# Altium PCB AgulhasCPU25.PCBDOC (part 7 of 10)
Units mm, origin at the board's own origin, x right, y up, seen from the top; angles counter-clockwise.
Board outline 179.96 x 114.94 mm, 2 copper layers (Top Layer, Top, Bottom Layer, Bottom), stack 1.341 mm thick; 247 components, 222 nets, 910 pads, 491 vias.
Unrouted connection lines stored in the file: 2.
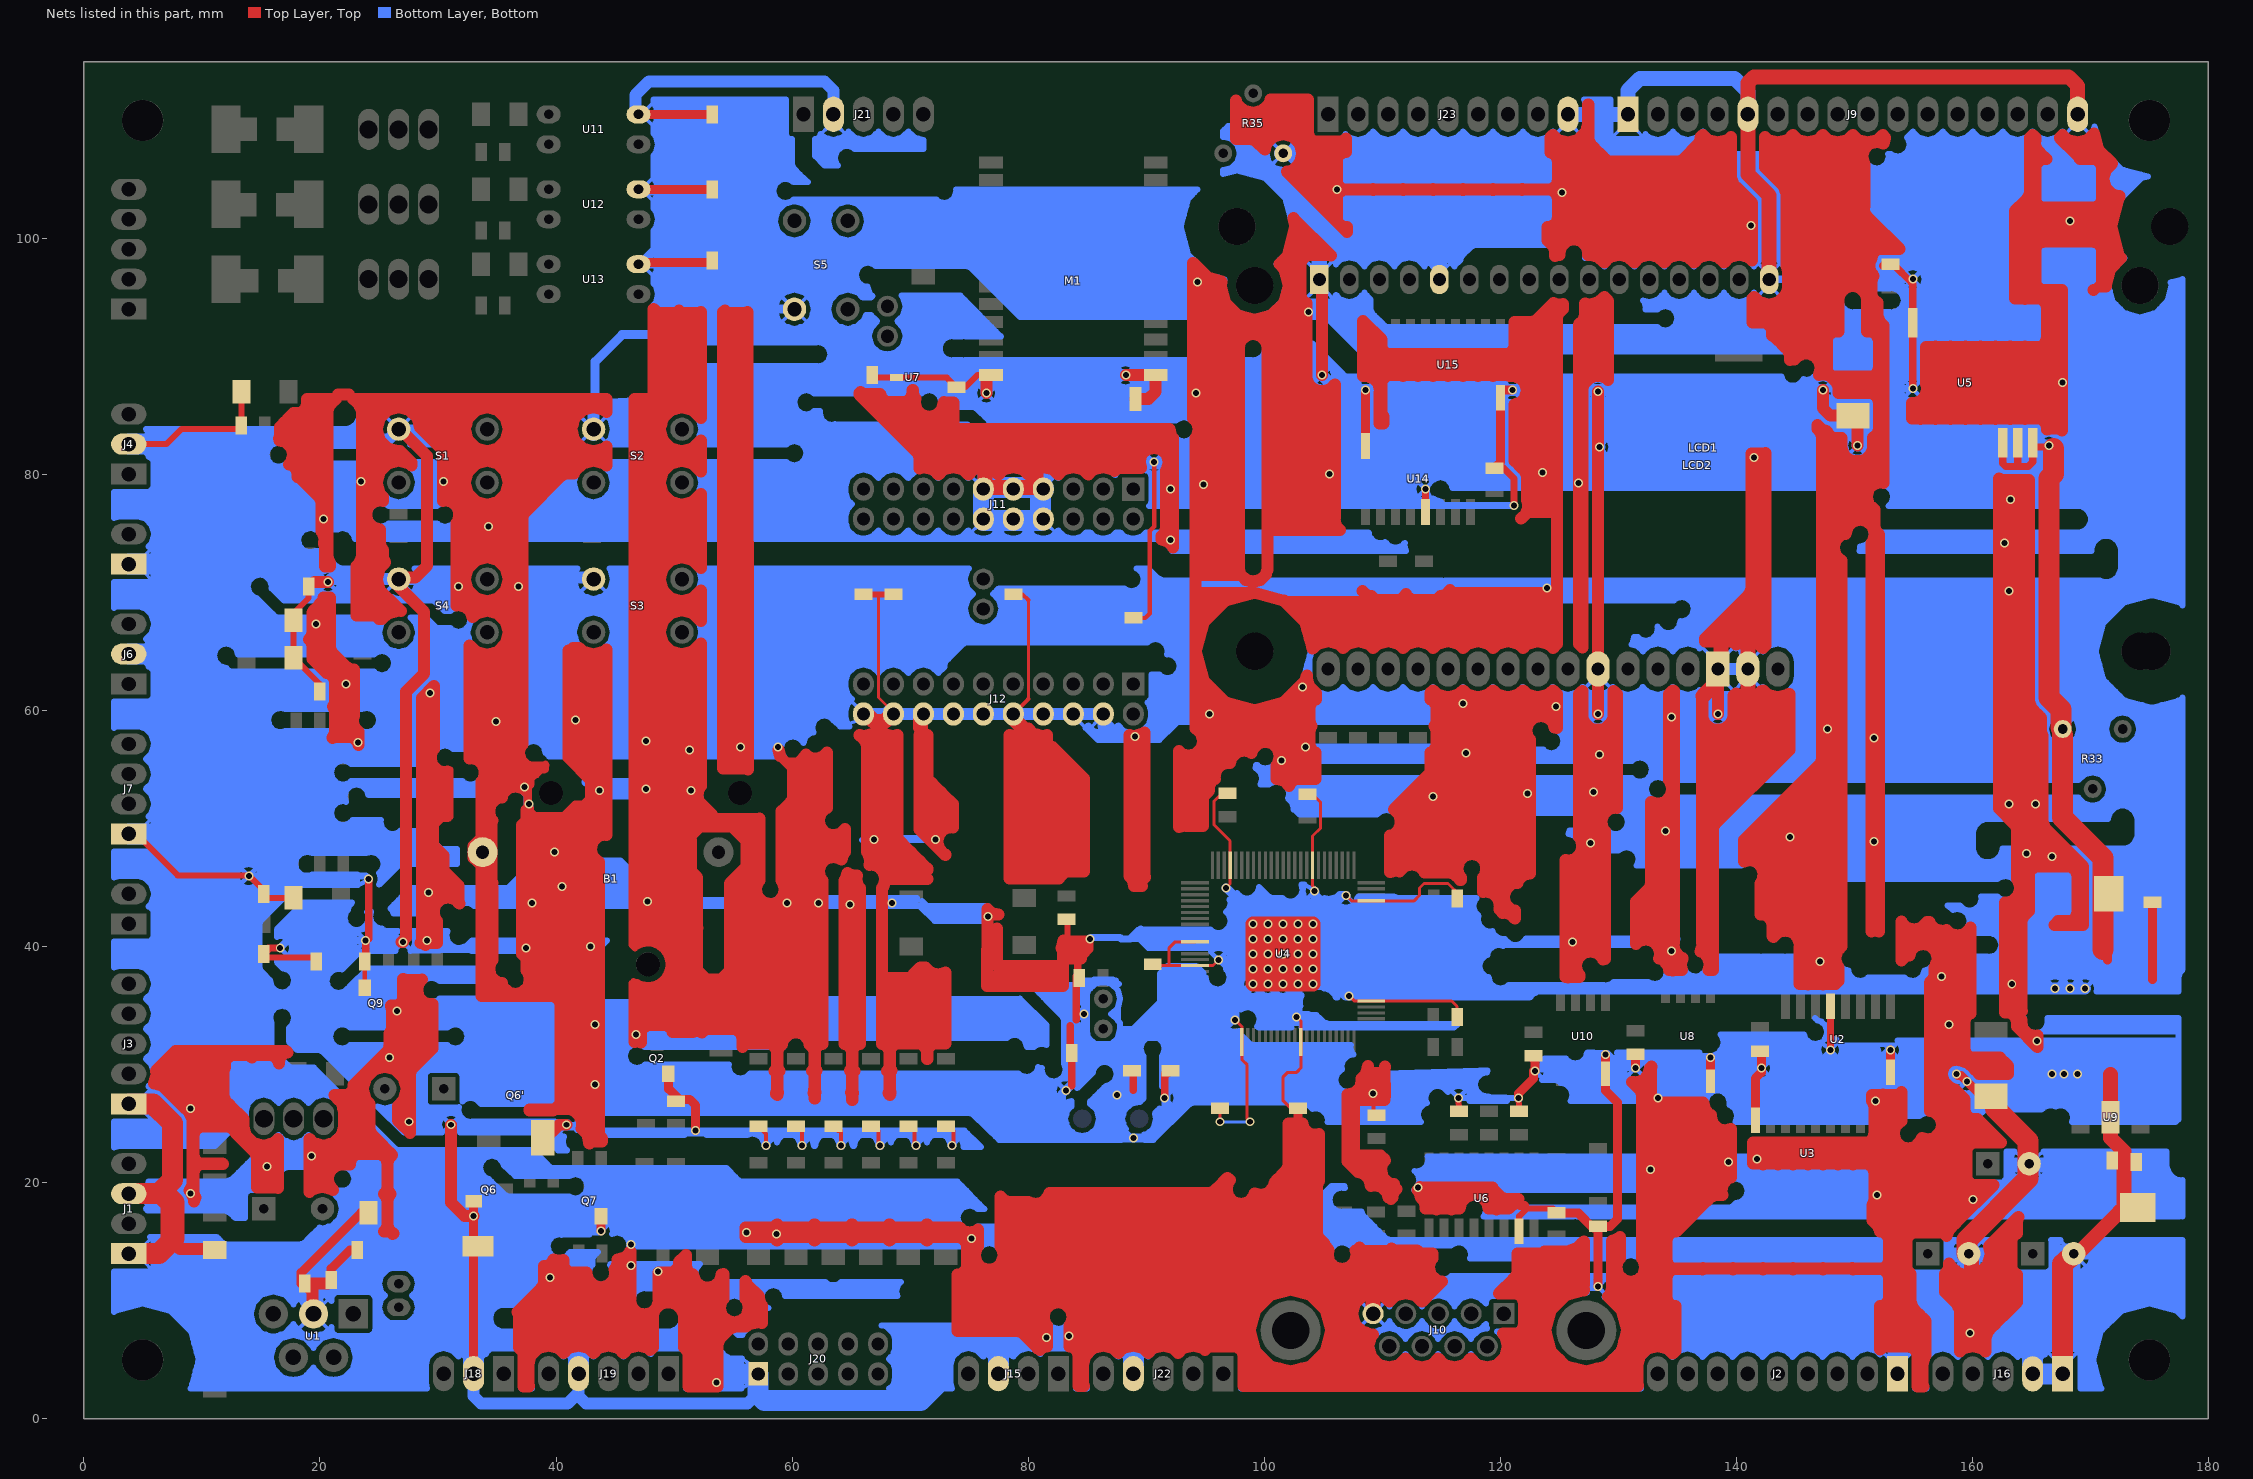
[diagram p7: the nets of this part, all layers, seen from the top]

## Via types
v1: diameter 0.762, hole 0.508, Top Layer, Top to Bottom Layer, Bottom, 489 vias
v2: diameter 0.864, hole 0.813, Top Layer, Top to Bottom Layer, Bottom, 2 vias

## Nets (pads, with @x,y where several pads share a name; then routed paths per layer and width w, separated by ;. In a path a pad name is that pad's centre, name@x,y a point inside that pad or via, vN(x,y) a via of type N, cw(c..) or ccw(c..) an arc to the next point about the centre after c; other vN are vias at no path point) (continued)
GND: (continued)
  Bottom Layer, Bottom w0.508: 118.567,108.458 120.167,108.458 ; 118.618,7.874 118.796,7.874 ; 118.72,17.501 177.8,17.501 ; 118.745,9.779 118.796,9.779 ; 118.897,27.305 118.974,27.305 ; 118.974,61.595 119.761,61.595 ; 119.177,108.839 119.558,108.839 ; 119.355,61.976 119.38,61.976 ; 119.71,4.826 125.451,4.826 ; 120.015,7.112 124.104,7.112 ; 120.04,36.449 165.964,36.449 ; 120.091,5.207 125.07,5.207 ; 120.218,40.64 105.156,40.64 ; 120.269,6.731 124.206,6.731 ; 120.294,5.588 124.689,5.588 ; 120.294,40.64 120.371,40.64 ; 120.371,6.35 124.308,6.35 ; 120.396,5.969 124.409,5.969 ; 121.107,108.458 122.707,108.458 ; 121.514,7.493 124.003,7.493 ; 121.514,61.595 122.301,61.595 ; 121.641,10.16 125.501,10.16 ; 121.666,86.36 127.483,86.36 ; 121.666,87.884 127.737,87.884 ; 121.717,108.839 122.098,108.839 ; 121.768,7.874 124.104,7.874 ; 121.793,8.255 124.206,8.255 ; 121.793,8.636 124.308,8.636 ; 121.793,9.017 124.409,9.017 ; 121.793,9.398 124.739,9.398 ; 121.793,9.779 125.12,9.779 ; 121.895,61.976 121.92,61.976 ; 121.945,86.741 127.305,86.741 ; 121.945,87.503 127.356,87.503 ; 122.174,40.64 134.976,40.64 ; 123.469,59.309 127.33,59.309 ; 123.647,108.458 125.247,108.458 ; 123.673,30.124 126.213,30.124 ; 123.825,28.981 130.759,28.981 ; 123.876,29.743 130.404,29.743 ; 123.927,29.362 130.505,29.362 ; 124.054,61.595 124.841,61.595 ; 124.206,58.928 127.61,58.928 ; 124.257,108.839 124.638,108.839 ; 124.384,58.547 166.243,58.547 ; 124.435,61.976 124.46,61.976 ; 124.917,28.6 157.81,28.6 ; 124.968,56.642 177.8,56.642 ; 124.968,58.166 166.268,58.166 ; 125.247,57.023 167.538,57.023 ; 125.247,57.785 166.37,57.785 ; 125.705,28.219 158.471,28.219 ; 126.009,27.076 137.465,27.076 ; 126.009,27.838 158.826,27.838 ; 126.111,27.457 137.668,27.457 ; 126.187,108.458 129.591,108.458 ; 126.238,49.403 160.045,49.403 ; 126.263,99.695 172.288,99.695 ; 126.39,15.113 154.61,15.113 ; 126.492,30.124 128.219,30.124 ; 126.594,61.595 127.381,61.595 ; 126.619,49.022 160.045,49.022 ; 126.67,48.26 130.15,48.26 ; 126.721,48.641 160.045,48.641 ; 126.797,108.839 129.311,108.839 ; 126.975,61.976 127,61.976 ; 127,99.314 172.39,99.314 ; 127.102,109.22 129.311,109.22 ; 127.152,30.505 127.965,30.505 ; 127.152,111.506 129.311,111.506 ; 127.178,98.933 172.491,98.933 ; 127.203,109.601 129.311,109.601 ; 127.229,98.552 172.644,98.552 ; 127.229,109.982 129.311,109.982 ; 127.229,110.363 129.311,110.363 ; 127.229,110.744 129.311,110.744 ; 127.229,111.125 129.311,111.125 ; 127.254,87.122 122.047,87.122 ; 127.305,30.886 127.864,30.886 ; 127.61,82.931 93.726,82.931 ; 128.143,4.445 131.826,4.445 ; 128.219,85.979 76.962,85.979 ; 128.27,98.171 129.311,98.171 ; 128.295,85.979 177.8,85.979 ; 128.422,83.312 149.708,83.312 ; 128.651,97.79 128.93,97.79 ; 128.778,12.065 130.404,12.065 ; 128.778,87.884 143.993,87.884 ; 128.905,58.928 137.77,58.928 ; 128.905,60.452 137.77,60.452 ; 129.032,10.16 177.8,10.16 ; 129.032,10.541 177.8,10.541 ; 129.032,86.36 146.66,86.36 ; 129.083,4.826 131.877,4.826 ; 129.134,49.784 125.857,49.784 ; 129.134,61.595 129.921,61.595 ; 129.159,11.684 177.8,11.684 ; 129.159,82.931 149.327,82.931 ; 129.159,87.503 144.729,87.503 ; 129.184,59.309 137.49,59.309 ; 129.184,60.071 137.49,60.071 ; 129.21,10.922 177.8,10.922 ; 129.21,86.741 146.38,86.741 ; 129.261,11.303 177.8,11.303 ; 129.261,87.122 146.279,87.122 ; 129.286,81.788 149.454,81.788 ; 129.337,82.55 149.225,82.55 ; 129.388,82.169 149.276,82.169 ; 129.413,9.779 177.8,9.779 ; 129.464,5.207 132.004,5.207 ; 129.515,61.976 129.54,61.976 ; 129.565,30.124 130.505,30.124 ; 129.794,9.398 173.711,9.398 ; 129.819,30.505 130.81,30.505 ; 129.845,5.588 132.385,5.588 ; 129.921,30.886 136.83,30.886 ; 130.124,5.969 170.485,5.969 ; 130.124,9.017 172.517,9.017 ; 130.226,6.35 170.586,6.35 ; 130.226,8.636 172.136,8.636 ; 130.327,6.731 170.688,6.731 ; 130.327,8.255 171.755,8.255 ; 130.429,7.112 170.79,7.112 ; 130.429,7.874 171.374,7.874 ; 130.429,49.784 160.045,49.784 ; 130.429,51.308 171.628,51.308 ; 130.531,7.493 170.993,7.493 ; 130.708,50.165 160.198,50.165 ; 130.708,50.927 171.475,50.927 ; 130.81,98.171 131.851,98.171 ; 131.191,97.79 131.47,97.79 ; 131.216,65.786 170.637,65.786 ; 131.242,48.26 160.045,48.26 ; 131.597,47.879 160.147,47.879 ; 131.648,47.117 141.046,47.117 ; 131.674,61.595 132.461,61.595 ; 131.674,65.405 132.461,65.405 ; 131.674,66.167 131.318,66.167 ; 131.699,12.065 177.8,12.065 ; 131.699,13.589 154.61,13.589 ; 131.699,47.498 160.401,47.498 ; 131.801,40.259 121.793,40.259 ; 131.851,53.975 132.563,53.975 ; 131.978,12.446 154.889,12.446 ; 131.978,13.208 154.61,13.208 ; 132.004,108.458 132.867,108.458 ; 132.055,30.505 136.779,30.505 ; 132.055,61.976 132.08,61.976 ; 132.055,65.024 132.08,65.024 ; 132.105,28.981 141.427,28.981 ; 132.258,94.361 148.92,94.361 ; 132.309,93.98 133.325,93.98 ; 132.334,55.88 177.8,55.88 ; 132.359,29.362 141.173,29.362 ; 132.359,30.124 136.881,30.124 ; 132.461,29.743 137.236,29.743 ; 132.588,54.356 133.299,54.356 ; 132.715,55.499 177.8,55.499 ; 132.766,54.737 170.078,54.737 ; 132.817,55.118 177.8,55.118 ; 132.842,40.259 134.874,40.259 ; 132.969,66.167 170.739,66.167 ; 133.045,36.83 129.413,36.83 ; 133.121,36.83 166.065,36.83 ; 133.172,94.742 134.569,94.742 ; 133.223,39.878 134.899,39.878 ; 133.248,66.548 134.188,66.548 ; 133.325,39.497 135.103,39.497 ; 133.35,98.171 134.391,98.171 ; 133.375,54.356 169.24,54.356 ; 133.452,66.929 133.35,66.929 ; 133.655,95.123 134.087,95.123 ; 133.731,97.79 134.01,97.79 ; 133.807,108.458 135.407,108.458 ; 133.858,37.211 149.962,37.211 ; 134.036,37.592 135.992,37.592 ; 134.214,61.595 135.001,61.595 ; 134.214,65.405 135.001,65.405 ; 134.239,5.588 134.925,5.588 ; 134.264,66.548 170.84,66.548 ; 134.417,108.839 134.798,108.839 ; 134.595,61.976 134.62,61.976 ; 134.595,65.024 134.62,65.024 ; 134.62,92.456 177.8,92.456 ; 134.62,93.98 149.2,93.98 ; 134.899,92.837 177.8,92.837 ; 134.899,93.599 173.076,93.599 ; 135.001,66.929 170.942,66.929 ; 135.179,67.31 171.044,67.31 ; 135.407,69.596 174.6,69.596 ; 135.712,94.742 137.109,94.742 ; 135.89,98.171 136.931,98.171 ; 136.144,69.215 173.177,69.215 ; 136.195,95.123 136.627,95.123 ; 136.271,68.072 171.78,68.072 ; 136.271,97.79 136.55,97.79 ; 136.322,68.834 172.542,68.834 ; 136.347,108.458 137.668,108.458 ; 136.373,68.453 172.161,68.453 ; 136.754,61.595 136.982,61.595 ; 136.754,65.405 136.982,65.405 ; 136.779,5.588 137.465,5.588 ; 136.957,108.839 137.338,108.839 ; 137.287,39.116 142.062,39.116 ; 137.414,37.973 149.479,37.973 ; 137.465,38.735 148.641,38.735 ; 137.516,38.354 148.819,38.354 ; 138.252,94.742 139.649,94.742 ; 138.328,29.743 141.072,29.743 ; 138.43,98.171 139.471,98.171 ; 138.684,30.124 141.173,30.124 ; 138.709,31.267 146.914,31.267 ; 138.735,30.886 147.015,30.886 ; 138.735,95.123 139.167,95.123 ; 138.786,30.505 141.478,30.505 ; 138.786,32.41 145.745,32.41 ; 138.811,97.79 139.09,97.79 ; 138.862,31.648 147.015,31.648 ; 138.887,32.029 145.999,32.029 ; 139.065,58.928 166.345,58.928 ; 139.065,60.452 174.396,60.452 ; 139.167,27.457 177.444,27.457 ; 139.319,5.588 140.005,5.588 ; 139.344,59.309 166.573,59.309 ; 139.344,60.071 177.8,60.071 ; 139.37,27.076 177.444,27.076 ; 139.421,26.695 177.444,26.695 ; 139.802,26.314 165.989,26.314 ; 139.852,61.595 140.081,61.595 ; 139.852,65.405 140.081,65.405 ; 139.954,25.171 152.502,25.171 ; 140.005,25.933 160.782,25.933 ; 140.056,25.552 152.933,25.552 ; 140.487,20.168 159.868,20.168 ; 140.691,18.644 177.8,18.644 ; 140.792,94.742 142.189,94.742 ; 140.843,19.787 177.8,19.787 ; 140.894,19.025 177.8,19.025 ; 140.945,19.406 177.8,19.406 ; 140.97,98.171 142.011,98.171 ; 141.122,47.117 177.8,47.117 ; 141.275,95.123 141.707,95.123 ; 141.351,97.79 141.63,97.79 ; 141.834,61.595 142.621,61.595 ; 141.834,65.405 142.621,65.405 ; 141.859,5.588 142.545,5.588 ; 141.859,46.736 177.8,46.736 ; 142.037,46.355 177.8,46.355 ; 142.088,45.974 162.763,45.974 ; 142.138,39.116 144.094,39.116 ; 142.215,61.976 142.24,61.976 ; 142.215,65.024 142.24,65.024 ; 142.723,30.505 147.269,30.505 ; 142.773,28.981 157.658,28.981 ; 143.027,29.362 157.632,29.362 ; 143.027,30.124 158.191,30.124 ; 143.129,29.743 157.734,29.743 ; 143.332,94.742 148.819,94.742 ; 143.51,98.171 172.695,98.171 ; 143.815,95.123 148.92,95.123 ; 143.891,97.79 172.314,97.79 ; 144.069,95.504 149.2,95.504 ; 144.094,97.409 154.407,97.409 ; 144.17,39.116 148.59,39.116 ; 144.17,95.885 154.153,95.885 ; 144.17,96.266 153.975,96.266 ; 144.17,96.647 153.924,96.647 ; 144.17,97.028 154.026,97.028 ; 144.374,61.595 172.11,61.595 ; 144.374,65.405 170.536,65.405 ; 144.399,5.588 145.085,5.588 ; 144.755,61.976 171.729,61.976 ; 144.755,65.024 170.434,65.024 ; 144.805,87.503 146.38,87.503 ; 144.983,62.357 171.348,62.357 ; 144.983,64.643 170.536,64.643 ; 145.085,62.738 171.044,62.738 ; 145.085,64.262 170.637,64.262 ; 145.11,63.119 170.942,63.119 ; 145.11,63.5 170.84,63.5 ; 145.11,63.881 170.739,63.881 ; 145.542,87.884 146.66,87.884 ; 145.821,90.17 177.8,90.17 ; 146.558,88.265 154.889,88.265 ; 146.558,89.789 177.8,89.789 ; 146.634,33.934 146.71,33.884 146.863,33.731 147.193,33.63 147.549,33.274 147.701,32.766 147.549,32.233 147.447,32.131 147.955,32.258 148.463,32.106 148.819,31.75 148.971,31.242 148.819,30.709 148.463,30.353 147.955,30.201 147.422,30.353 147.066,30.709 146.914,31.242 147.066,31.75 147.168,31.852 146.685,31.725 146.152,31.877 145.796,32.233 145.72,32.537 138.659,32.537 138.786,32.385 138.938,31.877 138.786,31.344 138.608,31.166 138.659,31.115 138.811,30.607 138.659,30.074 138.303,29.718 137.795,29.566 137.262,29.718 136.906,30.074 136.754,30.607 136.855,31.013 129.87,31.013 129.921,30.861 129.769,30.328 129.413,29.972 128.905,29.82 128.372,29.972 128.016,30.328 127.864,30.861 127.914,31.013 127.381,31.013 127.33,30.963 127.229,30.582 126.873,30.226 126.365,30.074 125.832,30.226 125.552,30.505 123.749,30.505 123.52,30.277 123.8,29.972 123.952,29.464 123.8,28.931 123.546,28.677 124.714,28.677 124.993,28.55 125.095,28.448 125.603,28.296 125.959,27.94 126.111,27.432 125.959,26.899 137.414,26.899 137.541,27.305 137.897,27.661 138.43,27.813 138.938,27.661 139.294,27.305 139.446,26.797 139.395,26.568 139.573,26.518 139.929,26.162 140.081,25.654 139.929,25.121 152.451,25.121 152.654,25.298 152.857,25.502 153.137,25.629 155.524,25.629 155.677,25.756 156.21,25.908 156.718,25.756 157.074,25.4 157.226,24.892 157.074,24.359 156.743,24.028 ; 146.837,88.646 177.8,88.646 ; 146.837,89.408 177.8,89.408 ; 146.939,5.588 147.625,5.588 ; 147.955,86.36 154.407,86.36 ; 147.955,87.884 154.153,87.884 ; 148.234,86.741 154.026,86.741 ; 148.234,87.503 153.975,87.503 ; 148.615,30.505 152.349,30.505 ; 148.869,30.886 152.095,30.886 ; 148.971,31.267 151.994,31.267 ; 149.479,5.588 150.165,5.588 ; 149.581,37.592 137.033,37.592 ; 150.19,81.407 128.905,81.407 ; 150.266,81.407 166.446,81.407 ; 150.749,83.312 165.964,83.312 ; 151.003,81.788 165.71,81.788 ; 151.13,74.168 170.231,74.168 ; 151.13,82.931 165.583,82.931 ; 151.181,82.169 165.532,82.169 ; 151.232,82.55 165.481,82.55 ; 151.409,74.549 170.561,74.549 ; 151.994,31.242 152.146,30.709 152.502,30.353 153.035,30.201 153.543,30.353 153.899,30.709 154.051,31.242 153.899,31.75 ; 152.019,5.588 152.197,5.588 ; 152.298,79.121 177.8,79.121 ; 152.527,106.172 172.288,106.172 ; 152.806,106.553 171.907,106.553 ; 153.035,78.74 177.8,78.74 ; 153.162,77.597 177.8,77.597 ; 153.213,78.359 177.8,78.359 ; 153.264,77.978 177.8,77.978 ; 153.619,106.934 152.908,106.934 ; 153.645,32.029 177.444,32.029 ; 153.695,30.505 177.444,30.505 ; 153.695,106.934 171.526,106.934 ; 153.797,93.98 172.517,93.98 ; 153.797,95.504 154.889,95.504 ; 153.924,87.122 148.336,87.122 ; 153.949,30.886 177.444,30.886 ; 153.949,31.648 177.444,31.648 ; 154.051,31.267 177.444,31.267 ; 154.076,94.361 172.136,94.361 ; 154.076,95.123 171.729,95.123 ; 154.432,107.315 171.145,107.315 ; 154.559,108.458 155.727,108.458 ; 154.61,12.827 132.08,12.827 ; 154.61,107.696 170.815,107.696 ; 154.661,108.077 170.713,108.077 ; 154.737,108.839 155.118,108.839 ; 154.965,88.265 177.8,88.265 ; 154.965,95.504 171.628,95.504 ; 155.143,2.921 155.981,2.921 ; 155.143,3.302 155.981,3.302 ; 155.143,3.683 155.981,3.683 ; 155.143,4.064 155.981,4.064 ; 155.143,4.445 155.981,4.445 ; 155.143,4.826 156.032,4.826 ; 155.143,5.207 156.159,5.207 ; 155.448,97.409 171.933,97.409 ; 155.702,87.884 177.8,87.884 ; 155.702,95.885 171.526,95.885 ; 155.829,37.592 177.495,37.592 ; 155.829,86.741 177.8,86.741 ; 155.829,97.028 171.78,97.028 ; 155.88,87.503 177.8,87.503 ; 155.88,96.266 171.577,96.266 ; 155.931,87.122 177.8,87.122 ; 155.931,96.647 171.679,96.647 ; 156.54,5.588 155.067,5.588 ; 156.591,38.354 177.8,38.354 ; 156.667,108.458 158.267,108.458 ; 156.769,38.735 177.8,38.735 ; 156.82,39.116 161.366,39.116 ; 156.947,25.552 160.401,25.552 ; 157.099,24.409 159.258,24.409 ; 157.15,25.171 160.02,25.171 ; 157.201,24.79 159.639,24.79 ; 157.277,108.839 157.658,108.839 ; 157.505,12.446 159.182,12.446 ; 157.785,12.827 158.547,12.827 ; 157.785,15.113 158.547,15.113 ; 157.81,13.208 158.217,13.208 ; 157.81,13.589 158.115,13.589 ; 157.81,13.97 158.013,13.97 ; 157.81,14.351 158.115,14.351 ; 157.81,14.732 158.217,14.732 ; 158.115,43.307 159.106,43.307 ; 158.394,5.588 159.08,5.588 ; 159.029,30.124 166.319,30.124 ; 159.207,108.458 160.807,108.458 ; 159.385,41.402 177.8,41.402 ; 159.385,42.926 177.8,42.926 ; 159.487,29.743 165.862,29.743 ; 159.664,41.783 177.8,41.783 ; 159.664,42.545 177.8,42.545 ; 159.817,108.839 160.198,108.839 ; 160.122,29.362 165.76,29.362 ; 160.172,12.446 163.779,12.446 ; 160.172,27.838 177.444,27.838 ; 160.401,43.307 177.8,43.307 ; 160.426,28.219 166.599,28.219 ; 160.426,28.981 165.786,28.981 ; 160.528,28.6 165.938,28.6 ; 160.528,50.546 130.81,50.546 ; 160.68,43.688 177.8,43.688 ; 160.807,12.827 163.5,12.827 ; 160.807,15.113 163.5,15.113 ; 160.934,5.588 161.62,5.588 ; 161.138,13.208 163.5,13.208 ; 161.138,14.732 163.5,14.732 ; 161.239,13.589 163.5,13.589 ; 161.239,14.351 163.5,14.351 ; 161.442,39.116 177.8,39.116 ; 161.747,108.458 163.347,108.458 ; 161.925,41.021 177.8,41.021 ; 162.154,47.498 177.8,47.498 ; 162.179,39.497 177.8,39.497 ; 162.306,40.64 177.8,40.64 ; 162.357,108.839 162.738,108.839 ; 162.382,39.878 177.8,39.878 ; 162.408,47.879 177.8,47.879 ; 162.535,48.26 177.8,48.26 ; 162.687,20.168 163.932,20.168 ; 162.839,45.974 177.8,45.974 ; 162.89,20.549 163.551,20.549 ; 162.89,20.93 163.297,20.93 ; 162.89,21.311 163.195,21.311 ; 162.89,21.692 163.144,21.692 ; 162.89,22.073 163.246,22.073 ; 162.89,22.454 163.373,22.454 ; 163.474,5.588 164.16,5.588 ; 163.5,13.97 161.341,13.97 ; 163.576,45.593 177.8,45.593 ; 163.703,44.45 177.8,44.45 ; 163.754,45.212 177.8,45.212 ; 163.805,44.831 177.8,44.831 ; 164.287,108.458 165.887,108.458 ; 164.363,33.934 164.363,33.782 164.313,33.655 164.363,33.503 164.363,33.452 164.389,33.325 164.465,33.122 164.49,33.071 164.77,32.791 164.821,32.766 165.024,32.69 165.151,32.664 165.202,32.664 165.354,32.614 165.481,32.664 165.532,32.664 165.659,32.69 165.862,32.766 165.913,32.791 166.192,33.071 166.218,33.122 166.294,33.325 166.345,33.452 166.345,33.503 166.37,33.655 166.345,33.782 166.345,33.934 177.444,33.934 177.444,25.349 177.19,25.121 168.427,25.121 168.529,25.527 168.377,26.035 168.021,26.391 167.513,26.543 167.081,26.441 167.03,26.441 166.624,26.543 166.091,26.391 165.989,26.314 ; 164.897,108.839 165.278,108.839 ; 165.633,20.168 177.8,20.168 ; 165.887,32.791 177.444,32.791 ; 166.014,5.588 166.192,5.588 ; 166.014,20.549 176.86,20.549 ; 166.192,22.454 176.428,22.454 ; 166.243,33.172 177.444,33.172 ; 166.268,20.93 176.581,20.93 ; 166.319,22.073 176.428,22.073 ; 166.345,33.553 177.444,33.553 ; 166.345,37.211 155.448,37.211 ; 166.37,21.311 176.428,21.311 ; 166.395,12.446 168.072,12.446 ; 166.421,21.692 176.428,21.692 ; 166.522,81.407 177.8,81.407 ; 166.675,12.827 167.437,12.827 ; 166.675,15.113 167.437,15.113 ; 166.7,13.208 167.107,13.208 ; 166.7,13.589 167.005,13.589 ; 166.7,13.97 166.903,13.97 ; 166.7,14.351 167.005,14.351 ; 166.7,14.732 167.107,14.732 ; 166.7,57.404 125.349,57.404 ; 166.827,108.458 168.427,108.458 ; 166.878,28.219 167.615,28.219 ; 167.005,83.312 177.8,83.312 ; 167.056,59.69 139.446,59.69 ; 167.157,30.124 167.335,30.124 ; 167.259,81.788 177.8,81.788 ; 167.386,82.931 177.8,82.931 ; 167.437,82.169 177.8,82.169 ; 167.437,108.839 167.818,108.839 ; 167.488,82.55 177.8,82.55 ; 167.716,57.023 172.618,57.023 ; 167.894,28.219 168.758,28.219 ; 168.123,26.314 177.444,26.314 ; 168.173,30.124 168.478,30.124 ; 168.199,59.69 172.136,59.69 ; 168.427,25.171 177.241,25.171 ; 168.427,25.933 177.444,25.933 ; 168.529,25.552 177.444,25.552 ; 168.554,57.404 171.78,57.404 ; 168.681,59.309 171.653,59.309 ; 168.885,57.785 171.45,57.785 ; 168.91,58.928 171.425,58.928 ; 168.986,58.166 171.348,58.166 ; 169.012,58.547 171.323,58.547 ; 169.037,28.219 177.444,28.219 ; 169.062,12.446 177.8,12.446 ; 169.113,52.451 133.858,52.451 ; 169.139,2.921 170.764,2.921 ; 169.139,3.302 170.663,3.302 ; 169.139,3.683 170.561,3.683 ; 169.139,4.064 170.459,4.064 ; 169.139,4.445 170.358,4.445 ; 169.139,4.826 170.256,4.826 ; 169.139,5.207 170.282,5.207 ; 169.316,30.124 177.444,30.124 ; 169.367,77.216 177.8,77.216 ; 169.367,108.458 170.612,108.458 ; 169.596,75.311 177.8,75.311 ; 169.697,12.827 177.8,12.827 ; 169.697,15.113 177.622,15.113 ; 169.697,28.6 177.444,28.6 ; 169.774,29.743 177.444,29.743 ; 169.85,28.981 177.444,28.981 ; 169.85,76.835 177.8,76.835 ; 169.875,29.362 177.444,29.362 ; 169.901,75.692 177.8,75.692 ; 169.977,108.839 170.51,108.839 ; 170.002,76.454 177.8,76.454 ; 170.028,13.208 177.8,13.208 ; 170.028,14.732 177.8,14.732 ; 170.028,76.073 177.8,76.073 ; 170.078,73.787 150.495,73.787 ; 170.129,13.589 177.8,13.589 ; 170.129,14.351 177.8,14.351 ; 170.18,37.211 177.444,37.211 ; 170.256,54.737 177.8,54.737 ; 170.282,109.22 170.409,109.22 ; 170.383,5.588 169.062,5.588 ; 170.459,36.83 177.444,36.83 ; 170.739,52.07 177.8,52.07 ; 171.094,54.356 177.8,54.356 ; 171.221,52.451 177.8,52.451 ; 171.399,67.691 135.89,67.691 ; 171.425,53.975 177.8,53.975 ; 171.45,52.832 177.8,52.832 ; 171.526,53.594 177.8,53.594 ; 171.552,53.213 177.8,53.213 ; 171.831,94.742 154.178,94.742 ; 171.958,51.689 102.489,51.689 ; 172.06,71.12 177.8,71.12 ; 172.06,74.549 177.8,74.549 ; 172.39,71.501 177.8,71.501 ; 172.39,74.168 177.8,74.168 ; 172.542,71.882 177.8,71.882 ; 172.542,73.787 177.8,73.787 ; 172.568,72.263 177.8,72.263 ; 172.568,72.644 177.8,72.644 ; 172.568,73.025 177.8,73.025 ; 172.568,73.406 177.8,73.406 ; 172.796,57.023 177.8,57.023 ; 173.279,59.69 177.8,59.69 ; 173.457,51.689 177.8,51.689 ; 173.584,48.641 177.8,48.641 ; 173.634,57.404 177.8,57.404 ; 173.761,59.309 177.8,59.309 ; 173.787,51.308 177.8,51.308 ; 173.838,49.022 177.8,49.022 ; 173.939,50.927 177.8,50.927 ; 173.965,49.403 177.8,49.403 ; 173.965,49.784 177.8,49.784 ; 173.965,50.165 177.8,50.165 ; 173.965,50.546 177.8,50.546 ; 173.965,57.785 177.8,57.785 ; 173.99,58.928 177.8,58.928 ; 174.066,58.166 177.8,58.166 ; 174.092,58.547 177.8,58.547 ; 175.285,93.599 177.8,93.599 ; 175.793,69.596 177.8,69.596 ; 175.844,93.98 177.8,93.98 ; 175.997,60.452 177.8,60.452 ; 176.225,9.398 177.8,9.398 ; 176.225,94.361 177.8,94.361 ; 176.53,94.742 177.8,94.742 ; 176.632,95.123 177.8,95.123 ; 176.733,95.504 177.8,95.504 ; 176.835,95.885 177.8,95.885 ; 176.835,96.266 177.8,96.266 ; 177.216,69.215 177.8,69.215 ; 177.419,9.017 177.8,9.017 ; 177.419,60.833 177.8,60.833 ; 177.444,36.449 170.561,36.449 ; 177.698,15.113 177.8,15.113 ; 177.724,37.973 155.931,37.973 ; 177.8,13.97 170.231,13.97 ; 177.8,17.882 139.395,17.882 ; 177.8,18.263 139.954,18.263 ; 177.8,40.259 162.408,40.259 ; 177.8,42.164 159.766,42.164 ; 177.8,44.069 163.322,44.069 ; 177.8,74.93 151.511,74.93 ; 177.8,81.026 91.694,81.026 ; 177.8,86.36 155.448,86.36 ; 177.8,89.027 146.939,89.027 ; 177.8,93.218 135.001,93.218 ; 5.258,17.78 5.41,17.628 11.938,17.628 12.065,17.577 12.344,17.45 12.675,17.12 12.827,16.993 13.64,16.993 13.64,18.847 13.691,19.075 13.919,19.304 ; 5.258,17.78 5.74,18.263 5.969,19.05 5.74,19.812 5.486,20.091 12.04,20.091 12.598,20.295 13.03,20.726 15.748,23.47 16.002,23.546 16.51,24.028 16.993,23.546 17.78,23.317 18.542,23.546 19.05,24.028 19.533,23.546 20.32,23.317 21.082,23.546 21.641,24.105 21.819,24.689 21.819,26.086 21.641,26.67 21.082,27.229 20.32,27.457 19.533,27.229 19.05,26.746 18.542,27.229 17.78,27.457 16.993,27.229 16.51,26.746 16.002,27.229 15.24,27.457 14.453,27.229 13.894,26.67 13.741,26.086 13.741,25.679 11.125,23.089 2.997,23.089 2.54,22.962 2.54,25.171 5.385,25.171 5.613,25.222 5.842,25.451 5.918,25.679 5.918,27.635 5.842,27.864 5.613,28.092 5.461,28.143 5.74,28.423 5.969,29.21 ; 5.258,33.02 5.74,32.512 5.969,31.75 5.74,30.963 5.258,30.48 5.74,29.972 5.969,29.21 ; 5.258,33.02 5.74,33.503 5.969,34.29 5.74,35.052 5.258,35.56 5.74,36.043 5.969,36.83 ; 5.258,55.88 5.74,55.372 5.969,54.61 5.74,53.823 5.258,53.34 5.74,52.832 5.969,52.07 ; 5.258,55.88 5.74,56.363 5.969,57.15 5.74,57.912 5.182,58.471 4.597,58.649 2.997,58.649 2.54,58.522 2.54,60.731 5.385,60.731 5.613,60.782 5.842,61.011 5.918,61.239 5.918,63.195 5.842,63.424 5.613,63.652 5.461,63.703 5.74,63.983 5.969,64.77 5.74,65.532 5.258,66.04 5.74,66.523 5.969,67.31 ; 5.969,36.83 5.74,37.592 5.182,38.151 4.597,38.329 2.997,38.329 2.54,38.202 2.54,40.411 5.385,40.411 5.613,40.462 5.842,40.691 5.918,40.919 5.918,42.875 5.842,43.104 5.613,43.332 5.461,43.383 5.74,43.663 5.969,44.45 ; 5.969,44.45 5.74,45.212 5.182,45.771 4.597,45.949 2.997,45.949 2.54,45.822 2.54,48.031 5.385,48.031 5.613,48.082 5.842,48.311 5.918,48.539 5.918,50.495 5.842,50.724 5.613,50.952 5.461,51.003 5.74,51.283 5.969,52.07 ; 5.969,67.31 5.74,68.072 5.182,68.631 4.597,68.809 2.997,68.809 2.54,68.682 2.54,70.891 5.385,70.891 5.613,70.942 5.842,71.171 5.918,71.399 5.918,73.355 5.842,73.584 5.613,73.812 5.461,73.863 5.74,74.143 5.969,74.93 ; 5.969,74.93 5.74,75.692 5.182,76.251 4.597,76.429 2.997,76.429 2.54,76.302 2.54,78.511 5.385,78.511 5.613,78.562 5.842,78.791 5.918,79.019 5.918,80.975 5.842,81.204 5.613,81.432 5.461,81.483 5.74,81.763 5.969,82.55 ; 5.969,82.55 5.74,83.312 5.258,83.82 5.283,83.845 22.327,83.845 22.784,84.023 23.139,84.379 23.343,84.836 23.343,84.963 25.679,85.09 25.222,84.633 24.994,83.82 25.222,82.982 25.781,82.423 25.73,82.398 25.705,82.398 17.17,82.398 17.018,82.525 16.51,82.677 15.977,82.525 15.621,82.169 15.469,81.661 15.621,81.128 15.977,80.772 16.51,80.62 17.018,80.772 17.17,80.924 26.162,80.924 26.441,81.026 26.467,81.051 59.512,81.051 59.665,80.899 60.198,80.747 60.706,80.899 61.062,81.255 61.214,81.788 ; 11.024,64.643 11.176,65.151 11.532,65.507 12.065,65.659 12.573,65.507 12.929,65.151 13.056,64.745 24.587,64.745 24.74,64.872 25.273,65.024 25.781,64.872 26.137,64.516 26.289,64.008 26.137,63.475 25.781,63.119 ; 11.024,64.643 11.176,64.11 11.532,63.754 12.04,63.602 12.065,63.576 12.268,63.373 12.548,63.271 24.587,63.271 24.74,63.119 ; 12.929,45.974 13.081,45.441 13.437,45.085 13.97,44.933 14.478,45.085 14.834,45.441 14.986,45.974 ; 12.929,45.974 13.081,46.482 13.437,46.838 13.97,46.99 14.478,46.838 14.834,46.482 14.986,45.974 ; 13.919,19.304 14.148,19.38 15.113,19.38 16.612,20.879 16.891,21.158 17.272,21.311 21.742,21.311 21.895,21.336 22.022,21.311 22.073,21.311 22.2,21.26 22.403,21.184 22.454,21.158 22.733,20.879 22.758,20.828 22.835,20.625 22.885,20.498 22.885,20.447 ; 14.376,69.596 14.021,69.952 13.868,70.485 14.021,70.993 14.376,71.349 14.91,71.501 15.418,71.349 15.773,70.993 15.926,70.485 15.9,70.333 16.942,69.317 29.464,69.317 29.743,69.19 30.531,68.428 31.064,68.428 31.217,68.555 31.75,68.707 32.258,68.555 32.614,68.199 32.766,67.691 ; 14.376,69.596 14.63,69.52 16.002,68.148 16.205,67.945 16.485,67.843 25.629,67.843 25.222,67.412 24.994,66.599 25.222,65.761 25.832,65.151 26.67,64.922 27.483,65.151 28.092,65.761 28.321,66.599 28.092,67.412 27.686,67.843 29.007,67.843 29.591,67.259 29.794,67.056 30.074,66.954 31.064,66.954 31.217,66.802 31.75,66.65 32.258,66.802 32.614,67.158 32.766,67.691 ; 17.653,39.878 17.501,40.386 17.145,40.742 16.637,40.894 16.358,40.818 16.358,41.453 18.593,43.713 22.708,43.713 22.682,43.663 22.479,43.459 22.377,43.18 22.377,43.078 22.225,42.926 22.073,42.418 22.225,41.885 22.581,41.529 23.114,41.377 23.622,41.529 23.978,41.885 24.13,42.418 24.003,42.901 24.054,42.951 24.333,42.951 24.232,42.545 ; 20.168,69.977 19.812,70.333 19.66,70.866 19.812,71.374 20.168,71.73 20.701,71.882 21.209,71.73 21.565,71.374 21.717,70.866 21.565,70.333 21.209,69.977 ; 20.168,69.977 20.701,69.825 21.209,69.977 ; 20.853,73.025 20.853,73.508 19.583,73.508 19.177,73.381 18.644,73.533 18.288,73.889 18.136,74.422 18.288,74.93 18.644,75.286 19.177,75.438 19.583,75.336 21.539,75.336 21.971,75.438 22.479,75.286 22.835,74.93 22.962,74.524 90.907,74.524 91.364,74.32 91.491,74.219 91.694,74.143 92.05,73.787 92.126,73.584 92.202,73.508 112.014,73.508 111.862,74.041 111.912,74.193 111.633,73.914 111.125,73.762 110.592,73.914 110.236,74.244 110.16,74.219 110.033,74.193 109.982,74.193 109.855,74.143 109.703,74.193 109.652,74.193 109.525,74.219 109.322,74.295 109.271,74.32 108.991,74.6 108.966,74.651 108.89,74.854 108.864,74.981 108.864,75.032 108.839,75.082 89.992,75.082 89.662,74.752 88.9,74.524 88.113,74.752 87.782,75.082 87.452,75.082 87.122,74.752 86.36,74.524 85.573,74.752 85.242,75.082 84.912,75.082 84.582,74.752 83.82,74.524 83.033,74.752 82.55,75.235 82.042,74.752 81.28,74.524 80.493,74.752 80.01,75.235 79.502,74.752 78.74,74.524 77.953,74.752 77.47,75.235 76.962,74.752 76.2,74.524 75.413,74.752 74.93,75.235 74.422,74.752 73.66,74.524 72.873,74.752 72.39,75.235 71.882,74.752 71.12,74.524 70.333,74.752 69.85,75.235 69.342,74.752 68.58,74.524 67.793,74.752 67.31,75.235 66.802,74.752 66.04,74.524 65.253,74.752 64.694,75.311 ; 20.853,73.025 21.031,72.568 21.387,72.212 21.844,72.034 25.298,72.034 25.222,71.933 24.994,71.12 ; 20.93,51.308 21.082,50.775 21.438,50.419 21.971,50.267 22.479,50.419 22.758,50.698 25.171,50.698 25.121,50.546 ; 20.93,54.737 21.082,55.245 21.438,55.601 21.971,55.753 22.479,55.601 22.631,55.474 29.718,55.474 29.566,56.007 29.718,56.515 30.074,56.871 30.607,57.023 31.115,56.871 31.267,56.744 35.433,56.744 35.712,56.617 36.881,55.474 37.668,55.474 37.567,55.499 ; 20.93,54.737 21.082,54.204 21.438,53.848 21.971,53.696 22.479,53.848 22.631,54 32.08,54 32.233,53.848 32.766,53.696 33.274,53.848 33.63,54.204 33.782,54.737 ; 21.361,31.496 21.006,31.852 20.853,32.385 21.006,32.893 21.361,33.249 21.895,33.401 22.403,33.249 22.555,33.122 30.81,33.122 30.963,33.249 31.496,33.401 32.004,33.249 32.36,32.893 32.512,32.385 32.36,31.852 32.004,31.496 ; 21.361,31.496 21.895,31.344 22.403,31.496 ; 21.869,17.78 21.641,18.593 21.031,19.202 20.599,19.329 21.742,19.329 21.895,19.279 22.022,19.329 22.073,19.329 22.2,19.355 22.403,19.431 22.454,19.456 22.733,19.736 22.758,19.787 22.835,19.99 22.885,20.117 22.885,20.168 22.911,20.32 22.885,20.447 ; 22.403,31.496 30.963,31.496 ; 22.403,31.496 22.555,31.648 30.81,31.648 30.963,31.496 ; 24.613,75.692 24.257,76.048 24.105,76.581 24.257,77.089 24.613,77.445 25.146,77.597 25.654,77.445 25.806,77.318 29.921,77.318 30.074,77.445 30.607,77.597 31.115,77.445 31.471,77.089 31.623,76.581 31.471,76.048 31.115,75.692 ; 24.613,75.692 25.146,75.54 25.654,75.692 ; 24.74,63.119 25.273,62.967 25.781,63.119 ; 24.994,71.12 25.222,70.282 25.832,69.672 26.67,69.444 27.483,69.672 28.092,70.282 28.321,71.12 ; 25.502,29.591 26.314,29.362 26.924,28.753 27.153,27.94 26.924,27.102 26.314,26.492 25.502,26.264 24.867,26.441 27.102,24.232 30.353,24.232 30.226,24.359 30.074,24.892 30.226,25.4 30.582,25.756 31.115,25.908 31.623,25.756 31.979,25.4 32.131,24.892 31.979,24.359 31.852,24.232 38.481,24.232 38.76,24.105 40.183,22.708 40.945,22.708 40.691,22.962 40.538,23.495 ; 25.502,29.591 24.663,29.362 24.054,28.753 23.825,27.94 24.003,27.305 20.218,31.09 19.939,31.217 18.085,31.217 17.374,31.928 17.374,33.096 17.678,33.426 17.831,33.96 17.678,34.468 17.323,34.823 16.815,34.976 16.281,34.823 15.926,34.468 15.773,33.96 15.9,33.528 15.9,31.75 15.9,31.471 16.002,31.191 16.205,30.988 17.145,30.048 17.348,29.845 17.628,29.743 19.482,29.743 26.162,23.063 26.365,22.86 26.645,22.758 38.024,22.758 39.243,21.539 39.446,21.336 39.726,21.234 54.407,21.234 55.245,20.396 55.448,20.193 55.728,20.091 73.965,20.091 76.302,17.755 75.717,17.755 75.565,17.882 75.057,18.034 74.524,17.882 74.168,17.526 74.016,17.018 ; 25.654,75.692 30.074,75.692 ; 25.654,75.692 25.806,75.844 29.921,75.844 30.074,75.692 ; 26.213,42.774 29.87,42.774 ; 26.213,42.774 29.87,42.774 ; 26.213,42.774 26.137,43.053 25.984,43.231 27.686,44.958 35.941,44.958 39.37,48.387 ; 28.321,71.12 32.487,71.12 ; 28.321,71.12 28.092,71.933 28.016,72.034 32.791,72.034 32.715,71.933 32.487,71.12 ; 28.829,49.784 29.591,48.133 29.337,48.387 29.21,48.387 28.702,47.879 31.242,47.879 30.226,47.879 29.464,48.641 29.464,49.022 27.686,47.244 27.305,47.244 31.242,47.244 31.242,47.625 27.686,47.625 27.051,46.99 26.543,46.99 31.623,46.99 31.623,48.26 30.226,48.26 29.718,48.768 29.718,49.784 28.829,49.784 ; 29.083,2.54 9.017,2.54 29.083,2.54 ; 29.083,2.54 28.981,2.997 28.981,4.597 29.134,5.182 29.693,5.74 30.48,5.969 ; 30.074,75.692 30.607,75.54 31.115,75.692 ; 30.48,5.969 31.242,5.74 31.75,5.258 32.233,5.74 33.02,5.969 ; 30.861,40.361 30.709,40.894 30.734,40.996 30.759,41.199 30.81,41.3 27.457,41.3 27.559,41.25 27.915,40.894 28.067,40.386 27.915,39.853 27.661,39.599 42.799,39.878 43.434,40.513 44.323,40.513 ; 30.963,31.496 31.496,31.344 32.004,31.496 ; 31.725,26.162 31.801,26.416 31.775,26.391 31.547,26.34 29.388,26.34 29.159,26.391 28.931,26.619 28.88,26.848 28.88,29.007 28.931,29.235 29.159,29.464 29.388,29.54 31.547,29.54 31.775,29.464 32.004,29.235 32.08,29.007 32.08,26.873 32.233,27.026 32.766,27.178 33.274,27.026 33.63,26.67 33.655,26.645 42.672,26.645 42.951,26.518 43.612,25.883 75.057,25.883 75.336,25.756 77.521,23.597 87.909,23.597 87.859,23.749 88.011,24.257 88.29,24.536 88.138,24.663 87.96,25.4 ; 31.725,26.162 31.877,25.629 32.233,25.273 32.766,25.121 32.893,25.171 39.929,25.171 39.853,24.892 40.005,24.359 40.361,24.003 40.665,23.901 40.538,23.495 ; 32.487,16.256 32.131,16.612 31.979,17.145 32.131,17.653 32.487,18.009 33.02,18.161 33.528,18.009 33.884,17.653 34.036,17.145 33.884,16.612 33.528,16.256 ; 32.487,16.256 33.02,16.104 33.528,16.256 ; 32.487,71.12 32.715,70.282 33.325,69.672 34.163,69.444 34.976,69.672 35.585,70.282 35.814,71.12 ; 33.02,5.969 33.782,5.74 34.061,5.461 34.112,5.613 34.341,5.842 34.569,5.918 36.525,5.918 36.754,5.842 36.982,5.613 37.059,5.385 37.059,2.54 ; 34.595,7.874 34.925,7.544 35.331,7.391 49.733,7.391 50.14,7.544 50.47,7.874 ; 34.595,7.874 34.442,8.28 34.442,8.712 34.595,9.119 34.925,9.449 35.331,9.627 46.558,9.627 46.533,9.703 46.507,9.83 46.507,9.881 46.457,10.033 46.507,10.16 46.507,10.211 46.533,10.338 46.609,10.541 46.634,10.592 46.914,10.871 46.965,10.897 47.168,10.973 47.295,11.024 47.346,11.024 47.498,11.049 47.625,11.024 51.232,11.024 51.613,10.871 55.397,7.087 55.778,7.087 55.804,7.214 56.363,7.772 56.82,7.899 55.728,7.899 55.448,8.001 55.245,8.204 55.093,8.357 54.585,8.509 54.229,8.865 54.077,9.398 ; 35.027,37.211 35.56,37.059 35.585,37.059 30.124,37.059 29.972,37.186 29.464,37.338 28.931,37.186 28.575,36.83 28.423,36.322 28.575,35.789 28.931,35.433 29.464,35.281 29.972,35.433 30.124,35.585 40.615,35.585 41.402,34.798 52.197,34.798 52.959,35.56 79.299,35.585 81.559,33.325 81.559,31.648 81.153,31.75 80.62,31.598 80.467,31.471 79.883,31.471 79.883,31.496 ; 35.814,71.12 41.504,71.12 ; 35.814,71.12 35.585,71.933 35.509,72.034 41.808,72.034 41.732,71.933 41.504,71.12 ; 37.059,2.54 37.973,2.54 ; 37.059,2.54 37.973,2.54 ; 37.567,55.499 37.211,55.855 37.059,56.388 37.211,56.896 37.567,57.252 38.1,57.404 38.608,57.252 38.964,56.896 39.116,56.388 39.421,56.109 59.309,56.109 59.182,56.236 59.03,56.769 59.182,57.277 59.538,57.633 60.071,57.785 60.579,57.633 60.935,57.277 60.96,57.226 61.087,57.658 61.443,58.014 61.798,58.115 61.697,58.547 ; 37.973,2.54 37.871,2.997 37.871,4.597 38.024,5.182 38.583,5.74 39.37,5.969 ; 39.243,47.498 39.37,48.387 ; 39.37,5.969 40.132,5.74 40.64,5.258 41.123,5.74 41.91,5.969 ; 41.504,71.12 41.732,70.282 42.342,69.672 43.18,69.444 43.993,69.672 44.602,70.282 44.831,71.12 ; 41.732,65.786 41.504,66.624 41.732,67.437 42.342,68.047 43.18,68.275 43.993,68.047 44.602,67.437 44.831,66.624 44.602,65.786 ; 41.732,65.786 42.342,65.176 43.18,64.948 43.993,65.176 44.602,65.786 ; 41.91,5.969 42.672,5.74 43.18,5.258 43.663,5.74 44.45,5.969 ; 42.443,24.028 50.876,24.028 ; 42.443,24.028 50.876,24.028 ; 42.443,24.028 42.088,24.359 41.783,24.46 41.91,24.892 41.834,25.171 42.215,25.171 42.672,24.714 42.875,24.511 43.155,24.409 ; 42.672,19.685 42.52,19.152 42.164,18.796 41.656,18.644 41.123,18.796 41.097,18.821 35.992,18.821 35.662,18.948 35.433,19.177 34.315,20.295 34.061,20.371 33.706,20.726 33.553,21.26 33.706,21.768 34.061,22.123 34.595,22.276 35.103,22.123 35.458,21.768 35.535,21.514 36.525,20.549 41.097,20.549 41.123,20.549 41.656,20.701 42.164,20.549 42.52,20.193 42.672,19.685 ; 42.774,15.875 42.926,16.383 43.282,16.739 43.815,16.891 44.323,16.739 44.679,16.383 44.831,15.875 ; 42.774,15.875 42.85,15.596 40.488,15.596 40.462,15.57 40.31,15.621 39.776,15.469 39.421,15.113 39.268,14.605 39.421,14.072 39.776,13.716 40.31,13.564 40.818,13.716 41.173,14.072 41.199,14.122 43.536,14.122 43.383,13.945 43.18,13.741 43.078,13.462 43.078,13.183 43.078,13.03 42.926,12.878 42.774,12.37 42.926,11.836 43.282,11.481 43.815,11.328 44.323,11.481 44.679,11.836 44.831,12.37 44.679,12.878 44.552,13.03 44.628,13.106 52.197,13.106 51.943,12.827 51.791,12.319 51.943,11.786 52.299,11.43 52.832,11.278 53.34,11.43 53.492,11.582 62.814,11.582 62.967,11.43 63.5,11.278 64.008,11.43 64.16,11.582 69.215,11.582 68.961,11.303 68.809,10.795 68.91,10.389 59.411,10.389 59.284,10.795 58.928,11.151 58.42,11.303 57.887,11.151 57.531,10.795 57.379,10.287 57.531,9.754 57.887,9.398 ; 43.155,24.409 50.775,24.409 50.775,24.384 50.876,24.028 ; 44.45,5.969 45.212,5.74 45.72,5.258 46.203,5.74 46.99,5.969 ; 44.602,65.786 49.225,65.786 ; 44.831,15.875 44.755,15.621 45.212,15.748 45.72,15.596 46.076,15.24 v1@46.228,14.732 ; 44.831,71.12 48.997,71.12 ; 44.831,71.12 44.602,71.933 44.526,72.034 49.301,72.034 49.225,71.933 48.997,71.12 ; 45.822,30.734 45.974,30.201 46.33,29.845 46.863,29.693 47.371,29.845 47.523,29.997 54.635,29.997 54.585,29.845 54.737,29.312 55.093,28.956 55.626,28.804 56.134,28.956 56.413,29.235 79.197,29.235 79.35,29.083 79.883,28.931 80.391,29.083 80.747,29.439 80.848,29.769 81.153,29.693 81.128,29.591 ; 45.822,30.734 45.974,31.242 46.33,31.598 46.863,31.75 47.371,31.598 47.523,31.471 59.284,31.471 59.284,31.496 ; v1@46.228,14.732 46.177,14.58 76.022,14.58 76.175,14.707 76.708,14.859 77.216,14.707 77.572,14.351 77.724,13.843 77.572,13.31 77.318,13.056 94.361,13.056 94.64,12.929 96.926,10.643 97.13,10.439 97.257,10.16 ; 46.99,5.969 47.752,5.74 48.031,5.461 48.082,5.613 48.311,5.842 48.539,5.918 50.495,5.918 50.724,5.842 50.952,5.613 51.029,5.385 51.029,2.54 ; 48.26,86.36 27.534,85.192 28.092,84.633 28.321,83.82 28.092,82.982 27.635,82.525 33.172,82.525 32.715,82.982 32.487,83.82 32.715,84.633 33.325,85.242 34.163,85.471 34.976,85.242 35.585,84.633 35.814,83.82 35.585,82.982 35.128,82.525 42.189,82.525 41.732,82.982 41.504,83.82 41.732,84.633 42.342,85.242 43.18,85.471 43.993,85.242 44.602,84.633 44.831,83.82 44.602,82.982 44.145,82.525 49.682,82.525 49.225,82.982 48.997,83.82 49.225,84.633 49.835,85.242 50.673,85.471 51.486,85.242 52.095,84.633 52.324,83.82 52.095,82.982 51.638,82.525 59.512,82.525 59.665,82.652 60.198,82.804 60.706,82.652 61.062,82.296 61.214,81.788 ; 48.26,86.36 48.26,89.179 62.078,89.179 62.23,89.129 62.357,89.179 62.408,89.179 62.535,89.205 62.738,89.281 62.789,89.306 63.068,89.586 63.094,89.637 63.17,89.84 63.221,89.967 63.221,90.018 63.246,90.17 ; 48.641,97.79 48.463,97.079 48.26,96.85 48.26,96.164 48.463,95.936 48.641,95.25 48.463,94.539 48.26,94.31 48.26,91.161 62.078,91.161 62.23,91.186 62.357,91.161 62.408,91.161 62.535,91.11 62.738,91.034 62.789,91.008 63.068,90.729 63.094,90.678 63.17,90.475 63.221,90.348 63.221,90.297 63.246,90.17 ; 48.641,97.79 48.463,98.476 48.26,98.704 48.26,100.66 48.463,100.889 48.641,101.6 ; 48.641,101.6 48.463,102.286 48.26,102.514 48.26,103.2 48.463,103.429 48.641,104.14 48.463,104.826 48.26,105.054 48.26,107.01 48.463,107.239 48.641,107.95 48.463,108.636 48.26,108.864 48.26,109.55 48.463,109.779 48.641,110.49 48.463,111.176 48.26,111.404 48.26,111.76 59.461,111.76 59.461,108.89 59.512,108.661 59.741,108.433 59.969,108.382 59.969,106.731 59.969,106.35 60.096,105.969 60.376,105.689 61.341,104.75 60.096,104.75 59.944,104.877 59.436,105.029 58.903,104.877 58.547,104.521 58.395,104.013 58.547,103.48 58.903,103.124 ; 48.997,71.12 49.225,70.282 49.835,69.672 50.673,69.444 51.486,69.672 52.095,70.282 52.324,71.12 ; 49.225,65.786 48.997,66.624 49.225,67.437 49.835,68.047 50.673,68.275 51.486,68.047 52.095,67.437 52.324,66.624 52.095,65.786 ; 49.225,65.786 49.835,65.176 50.673,64.948 51.486,65.176 52.095,65.786 ; 50.47,7.874 50.648,8.28 50.648,8.712 50.495,9.042 50.622,9.042 54.127,5.512 54.407,5.232 54.788,5.105 55.753,5.105 55.728,5.08 55.677,4.851 55.677,2.692 55.702,2.54 ; 51.029,2.54 55.702,2.54 ; 51.029,2.54 55.702,2.54 ; 52.324,71.12 74.625,71.12 ; 52.324,71.12 52.095,71.933 52.019,72.034 74.981,72.034 74.854,71.882 74.625,71.12 ; 54.077,9.398 54.229,9.906 54.585,10.262 55.118,10.414 55.626,10.262 55.982,9.906 56.134,9.398 56.185,9.373 57.988,9.373 57.887,9.398 ; 58.522,93.98 58.75,94.793 59.36,95.402 60.198,95.631 61.011,95.402 61.62,94.793 61.849,93.98 ; 58.522,93.98 58.75,93.142 59.36,92.532 60.198,92.304 61.011,92.532 61.62,93.142 61.849,93.98 ; 58.903,103.124 59.436,102.972 59.944,103.124 ; 59.284,31.496 59.436,32.004 59.792,32.36 60.325,32.512 60.833,32.36 60.985,32.233 78.181,32.233 78.334,32.36 78.867,32.512 79.375,32.36 79.731,32.004 79.883,31.496 ; 59.944,103.124 60.096,103.276 72.212,103.276 72.365,103.124 ; 60.198,103.124 61.011,102.895 61.62,102.286 61.849,101.473 61.62,100.635 61.011,100.025 60.198,99.797 59.36,100.025 58.75,100.635 58.522,101.473 58.75,102.286 59.36,102.895 60.198,103.124 ; 60.681,85.217 61.214,85.065 61.722,85.217 ; 60.681,85.217 60.325,85.573 60.173,86.106 60.325,86.614 60.681,86.97 61.214,87.122 61.722,86.97 61.874,86.843 70.942,86.843 71.095,86.97 71.628,87.122 72.136,86.97 72.492,86.614 72.644,86.106 72.542,85.7 75.311,85.7 75.59,85.573 76.632,84.557 92.532,84.557 92.685,84.684 93.218,84.836 93.726,84.684 94.082,84.328 94.234,83.82 94.082,83.287 93.726,82.931 ; 61.697,58.547 61.849,59.055 62.205,59.411 62.738,59.563 63.246,59.411 63.475,59.182 63.5,59.182 63.525,59.157 64.059,58.649 64.846,58.649 64.694,58.801 64.541,59.385 64.541,59.969 64.694,60.554 65.075,60.96 64.694,61.341 64.541,61.925 64.541,62.509 64.694,63.094 65.253,63.652 66.04,63.881 ; 61.722,85.217 62.332,85.217 ; 61.722,85.217 61.874,85.369 62.382,85.369 62.332,85.217 ; 61.849,93.98 63.043,93.98 ; 62.332,85.217 62.484,84.684 62.84,84.328 63.373,84.176 63.627,84.252 63.729,84.226 74.854,84.226 75.692,83.388 75.895,83.185 76.175,83.083 92.532,83.083 92.685,82.931 ; 62.433,108.814 62.382,108.661 62.154,108.433 61.951,108.382 61.951,106.959 62.763,106.147 ; 62.433,108.814 62.713,108.534 63.5,108.306 64.262,108.534 64.77,109.017 65.253,108.534 66.04,108.306 66.802,108.534 67.31,109.017 67.793,108.534 68.58,108.306 69.342,108.534 69.85,109.017 70.333,108.534 71.12,108.306 71.12,107.544 65.303,107.544 65.151,107.671 64.643,107.823 64.11,107.671 63.754,107.315 63.602,106.807 63.754,106.274 63.881,106.147 ; 62.763,106.147 63.881,106.147 ; 62.763,106.147 63.881,106.147 ; 63.043,93.98 63.271,94.793 63.881,95.402 64.719,95.631 65.532,95.402 65.989,94.971 66.7,94.971 66.726,94.996 66.802,95.098 66.548,95.352 66.396,95.86 65.888,96.012 65.532,96.368 65.38,96.901 65.532,97.409 65.888,97.765 66.421,97.917 66.929,97.765 67.081,97.638 74.803,97.638 75.082,97.511 79.299,93.32 99.111,93.32 97.841,93.65 96.85,94.64 96.495,95.987 96.622,96.495 95.301,96.85 93.548,98.603 92.913,100.99 93.548,103.353 94.336,104.14 73.889,104.14 73.914,104.013 73.762,103.48 73.406,103.124 ; 63.043,93.98 63.271,93.142 63.881,92.532 64.719,92.304 65.532,92.532 66.142,93.142 66.243,93.497 66.7,93.497 66.726,93.447 67.208,92.964 66.726,92.456 66.497,91.694 ; 64.694,75.311 64.541,75.895 64.541,76.479 64.694,77.064 65.075,77.47 64.694,77.851 64.541,78.435 64.541,79.019 64.694,79.604 65.253,80.162 66.04,80.391 66.802,80.162 67.31,79.68 67.793,80.162 68.58,80.391 69.342,80.162 69.85,79.68 70.333,80.162 71.12,80.391 71.882,80.162 72.39,79.68 72.873,80.162 73.66,80.391 74.422,80.162 74.93,79.68 75.413,80.162 76.2,80.391 76.962,80.162 77.47,79.68 77.953,80.162 78.74,80.391 79.502,80.162 80.01,79.68 80.493,80.162 81.28,80.391 82.042,80.162 82.55,79.68 83.033,80.162 83.82,80.391 84.582,80.162 84.912,79.858 85.242,79.858 85.573,80.162 86.36,80.391 87.122,80.162 87.376,79.934 87.401,80.035 87.63,80.264 ; 64.719,103.124 72.365,103.124 ; 64.719,103.124 65.532,102.895 66.142,102.286 66.37,101.473 66.142,100.635 65.532,100.025 64.719,99.797 63.881,100.025 63.271,100.635 63.043,101.473 63.271,102.286 63.881,102.895 64.719,103.124 ; 65.913,48.997 72.517,48.997 ; 65.913,48.997 72.517,48.997 ; 65.913,48.997 66.091,49.174 72.568,49.174 72.517,48.997 ; 66.04,63.881 66.802,63.652 67.31,63.17 67.793,63.652 68.58,63.881 ; 66.497,91.694 66.726,90.907 67.285,90.348 68.072,90.119 68.834,90.348 69.393,90.907 69.621,91.694 ; 68.224,2.54 73.533,2.54 ; 68.224,2.54 73.533,2.54 ; 68.224,2.54 68.58,2.87 68.732,3.429 68.732,4.115 68.58,4.674 68.199,5.055 68.58,5.41 68.732,5.969 68.732,6.655 68.58,7.214 68.021,7.772 67.564,7.899 81.864,7.899 82.017,7.747 82.55,7.595 83.058,7.747 83.414,8.103 83.566,8.636 ; 68.58,63.881 69.342,63.652 69.85,63.17 70.333,63.652 71.12,63.881 ; 69.621,91.694 69.393,92.456 68.91,92.964 69.393,93.447 69.621,94.234 69.393,94.996 69.266,95.148 74.219,95.148 77.699,91.669 74.676,91.669 74.549,91.694 74.397,91.669 73.66,91.669 73.533,91.694 73.381,91.669 73.33,91.669 73.203,91.618 73,91.542 72.949,91.516 72.669,91.237 72.644,91.186 72.568,90.983 72.542,90.856 72.542,90.805 72.492,90.678 72.542,90.526 72.542,90.475 72.568,90.348 72.644,90.145 72.669,90.094 72.949,89.814 73,89.789 ; 71.12,63.881 72.923,63.881 ; 71.12,63.881 71.882,63.652 72.39,63.17 72.873,63.652 72.923,63.678 72.923,63.881 ; 72.365,103.124 72.898,102.972 73.406,103.124 ; 72.923,63.881 73.025,64.16 73.228,64.364 74.295,65.43 74.498,65.634 74.778,65.761 90.119,65.761 90.272,65.888 90.805,66.04 91.313,65.888 91.669,65.532 91.821,65.024 ; 73,89.789 73.203,89.713 73.33,89.687 73.381,89.687 73.533,89.637 73.66,89.687 74.397,89.687 74.549,89.637 74.676,89.687 98.908,89.687 99.06,89.637 99.187,89.687 99.238,89.687 99.365,89.713 99.568,89.789 ; 73.533,2.54 73.431,2.997 73.431,4.597 73.584,5.182 74.143,5.74 74.93,5.969 ; 74.016,17.018 74.168,16.485 74.524,16.129 75.057,15.977 75.565,16.129 75.717,16.281 102.108,16.281 102.387,16.383 105.715,19.71 106.782,19.71 106.782,19.685 ; 74.524,23.012 75.997,23.012 ; 74.524,23.012 75.997,23.012 ; 74.524,23.012 74.549,23.114 74.397,23.622 74.041,23.978 73.533,24.13 73,23.978 72.949,23.927 72.949,23.952 72.898,23.978 72.695,24.054 72.568,24.105 72.517,24.105 72.39,24.13 72.238,24.105 72.187,24.105 72.06,24.054 71.857,23.978 71.806,23.952 71.526,23.673 71.501,23.622 71.425,23.419 71.425,23.393 71.349,23.622 70.993,23.978 70.485,24.13 69.952,23.978 69.901,23.927 69.901,23.952 69.85,23.978 69.647,24.054 69.52,24.105 69.469,24.105 69.342,24.13 69.19,24.105 69.139,24.105 69.012,24.054 68.809,23.978 68.758,23.952 68.478,23.673 68.453,23.622 68.377,23.419 68.377,23.393 68.301,23.622 67.945,23.978 67.437,24.13 66.904,23.978 66.853,23.927 66.853,23.952 66.802,23.978 66.599,24.054 66.472,24.105 66.421,24.105 66.294,24.13 66.142,24.105 66.091,24.105 65.964,24.054 65.761,23.978 65.71,23.952 65.43,23.673 65.405,23.622 65.329,23.419 65.303,23.292 65.303,23.241 65.253,23.114 65.253,23.089 65.151,23.089 65.151,23.114 64.999,23.622 64.643,23.978 64.135,24.13 63.602,23.978 63.551,23.927 63.551,23.952 63.5,23.978 63.297,24.054 63.17,24.105 63.119,24.105 62.992,24.13 62.84,24.105 62.789,24.105 62.662,24.054 62.459,23.978 62.408,23.952 62.128,23.673 62.103,23.622 62.027,23.419 62.001,23.292 62.001,23.241 61.951,23.114 61.951,23.089 61.849,23.089 61.849,23.114 61.697,23.622 61.341,23.978 60.833,24.13 60.3,23.978 60.249,23.927 60.249,23.952 60.198,23.978 59.995,24.054 59.868,24.105 59.817,24.105 59.69,24.13 59.538,24.105 59.487,24.105 59.36,24.054 59.157,23.978 59.106,23.952 58.826,23.673 58.801,23.622 58.725,23.419 58.725,23.393 58.649,23.622 58.293,23.978 57.785,24.13 57.252,23.978 57.201,23.927 57.201,23.952 57.15,23.978 56.947,24.054 56.82,24.105 56.769,24.105 56.642,24.13 56.49,24.105 56.439,24.105 56.312,24.054 56.21,24.028 52.73,24.028 52.832,24.384 52.832,24.409 74.6,24.409 75.997,23.012 ; 74.625,71.12 74.854,70.333 75.336,69.85 74.854,69.342 74.625,68.58 74.854,67.793 75.413,67.234 76.2,67.005 76.962,67.234 77.521,67.793 77.749,68.58 77.521,69.342 77.038,69.85 77.521,70.333 88.138,70.333 88.24,70.231 88.773,70.079 89.281,70.231 89.637,70.587 89.789,71.12 ; 74.93,5.969 75.692,5.74 76.2,5.258 76.683,5.74 77.47,5.969 ; 75.921,85.979 76.454,85.827 76.962,85.979 ; 75.921,85.979 75.565,86.335 75.413,86.868 75.565,87.376 75.921,87.732 76.454,87.884 76.962,87.732 77.318,87.376 77.47,86.868 77.318,86.335 76.962,85.979 ; 77.47,5.969 78.232,5.74 78.74,5.258 79.223,5.74 80.01,5.969 ; 80.01,5.969 80.772,5.74 81.051,5.461 81.102,5.613 81.331,5.842 81.559,5.918 83.515,5.918 83.744,5.842 83.972,5.613 84.049,5.385 84.049,2.54 ; 81.128,29.591 81.28,29.058 81.636,28.702 82.169,28.55 82.652,28.677 82.296,28.321 82.144,27.813 82.296,27.28 82.652,26.924 ; 82.652,26.924 83.185,26.772 83.668,26.899 83.668,26.441 83.312,26.111 83.134,25.4 ; 83.033,33.782 83.033,30.124 83.033,30.099 83.185,29.591 ; 83.134,25.4 83.312,24.663 83.845,24.13 84.582,23.952 85.293,24.13 85.827,24.663 86.004,25.4 ; 83.185,29.591 83.033,29.058 82.677,28.702 83.185,28.829 83.693,28.677 84.049,28.321 84.15,27.991 85.471,29.312 85.598,29.718 85.954,30.074 86.487,30.226 86.995,30.074 87.351,29.718 87.503,29.21 ; 83.566,8.636 83.49,8.915 89.078,8.915 90.703,7.29 90.703,5.766 90.653,5.74 90.17,5.258 89.662,5.74 88.9,5.969 ; 84.049,2.54 84.963,2.54 ; 84.049,2.54 84.963,2.54 ; 84.176,33.401 83.82,33.757 83.668,34.29 83.82,34.798 84.176,35.154 84.709,35.306 84.988,35.23 84.912,35.56 85.09,36.271 85.623,36.805 86.36,36.982 87.071,36.805 87.605,36.271 87.782,35.56 87.605,34.823 87.071,34.29 86.995,34.29 87.071,34.265 87.605,33.731 87.605,34.646 87.605,33.68 87.757,33.528 87.757,32.893 87.782,33.02 ; 84.176,33.401 84.709,33.249 84.988,33.325 84.912,33.02 ; 84.912,33.02 85.09,32.283 85.623,31.75 86.36,31.572 87.071,31.75 87.605,32.283 87.782,33.02 ; 84.963,2.54 84.861,2.997 84.861,4.597 85.014,5.182 85.573,5.74 86.36,5.969 ; 86.004,25.4 87.96,25.4 ; 86.004,25.4 85.827,26.111 85.293,26.645 85.242,26.645 85.242,26.848 86.589,28.194 86.995,28.321 87.351,28.677 87.503,29.21 ; 86.36,5.969 87.122,5.74 87.63,5.258 88.113,5.74 88.9,5.969 ; 87.63,80.264 87.859,80.34 89.916,80.34 89.967,80.315 89.789,80.493 89.637,81.026 ; 87.732,87.503 87.376,87.859 87.224,88.392 87.376,88.9 87.732,89.256 88.265,89.408 88.773,89.256 89.129,88.9 89.281,88.392 89.129,87.859 88.773,87.503 ; 87.732,87.503 88.265,87.351 88.773,87.503 ; 87.96,25.4 88.138,26.111 88.671,26.645 89.408,26.822 89.459,26.822 89.764,27.102 89.764,30.734 ; 88.773,87.503 104.369,87.503 ; 89.637,81.026 89.789,81.534 90.145,81.89 90.678,82.042 91.186,81.89 91.542,81.534 91.694,81.026 ; 89.662,40.64 89.789,40.64 89.535,40.894 89.535,40.767 89.662,40.64 ; 89.764,30.734 89.662,30.836 89.51,31.369 89.662,31.877 90.018,32.233 90.551,32.385 91.059,32.233 91.415,31.877 91.567,31.369 91.415,30.836 91.338,30.734